# EAGLE board Qwiic_BMI270-Panel (EAGLE 9.6.2), part 1 of 3
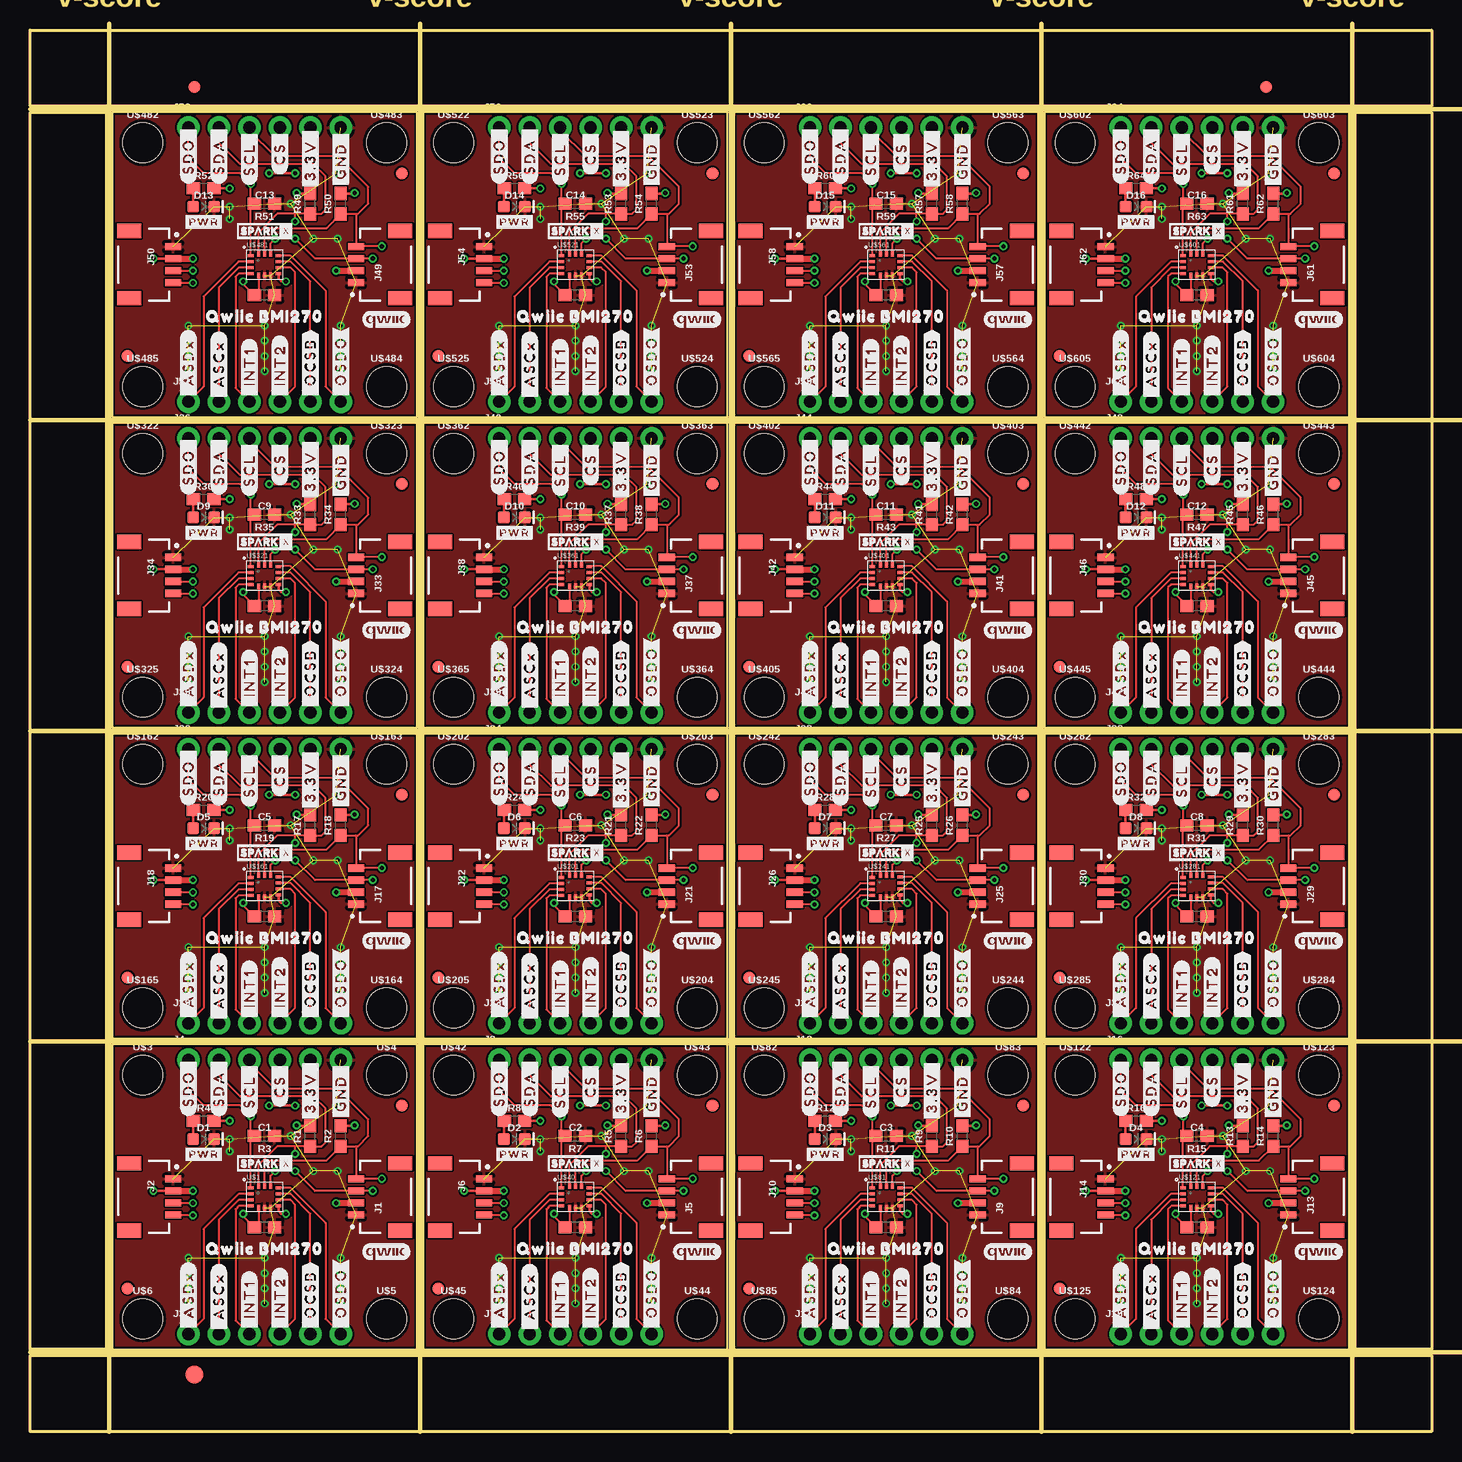
[diagram p0: board, top side]
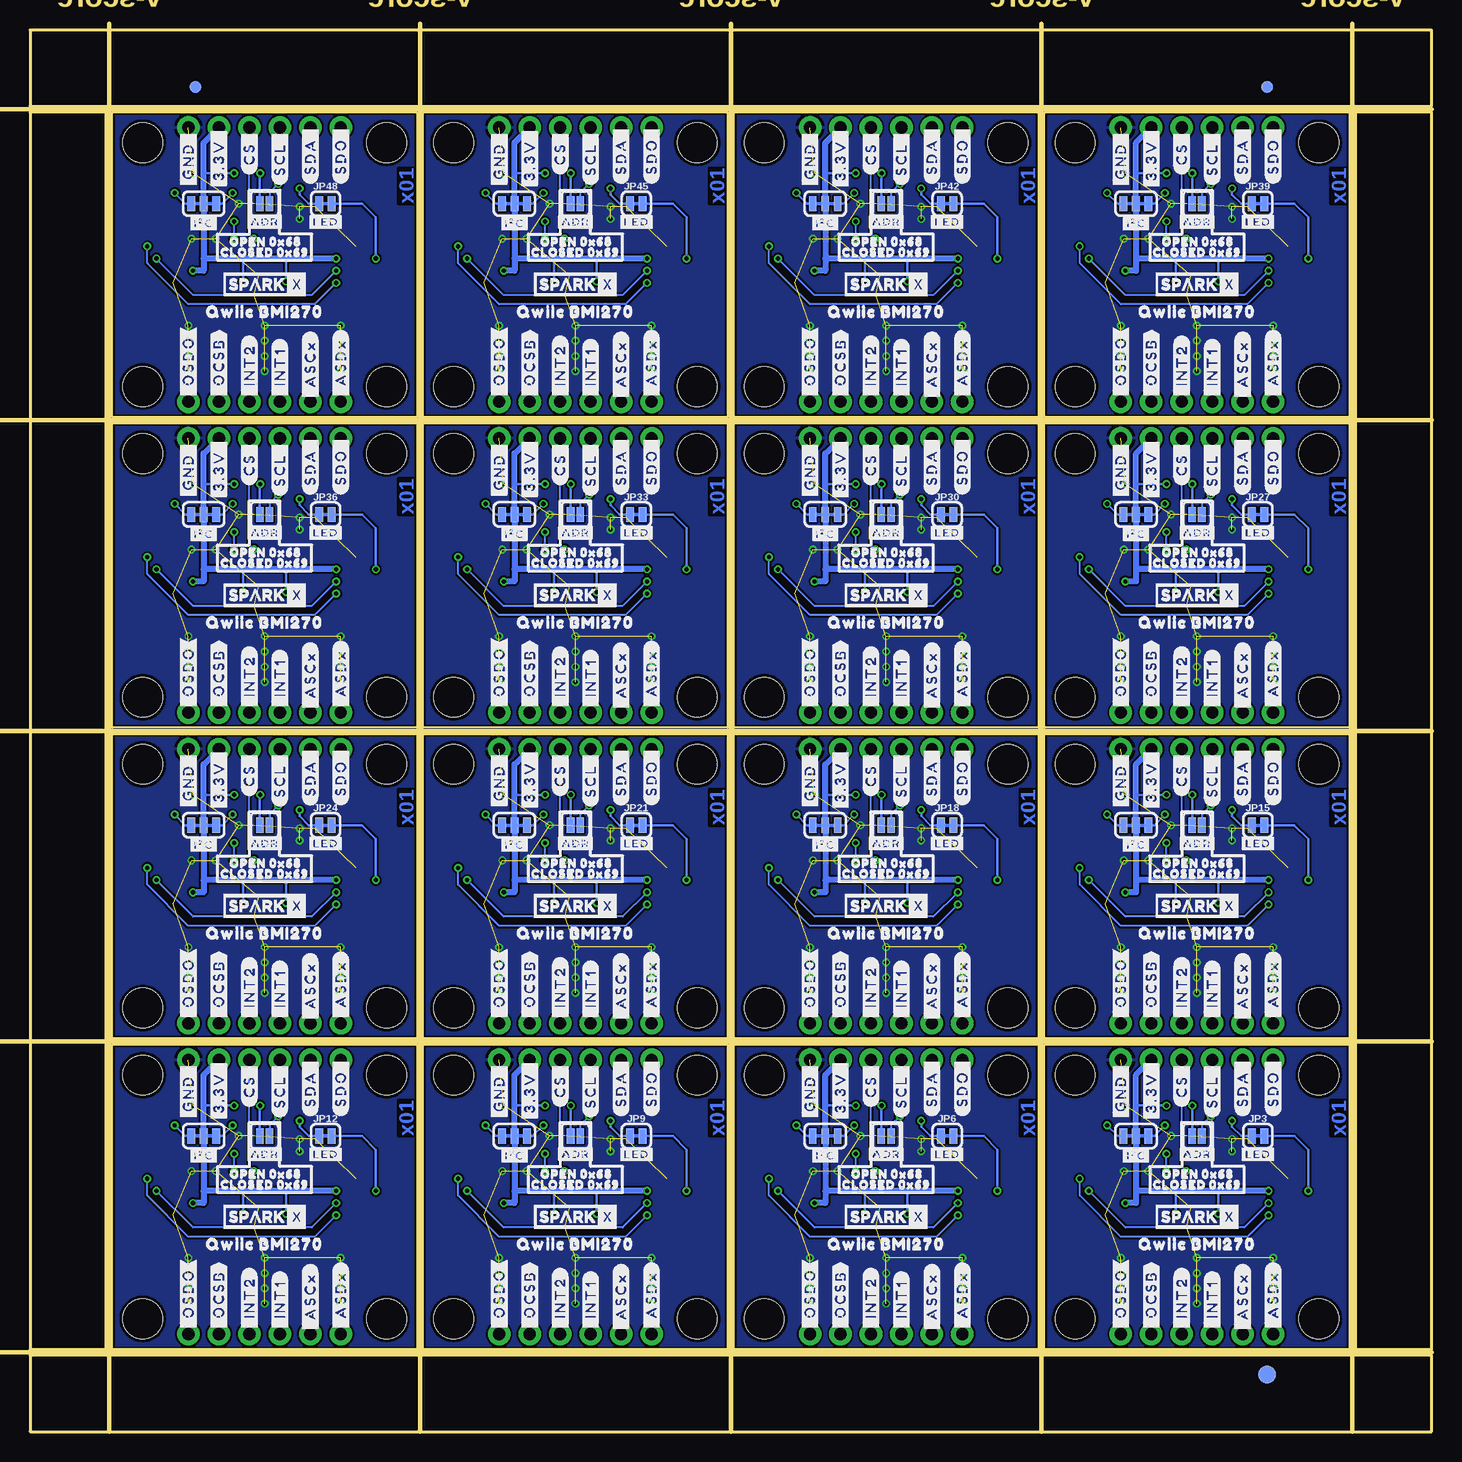
[diagram p1: board, bottom side, seen from below]

Size 116.84 x 116.84 mm. Coordinates in mm from the lower left corner, seen from the top.
Outline: 6.86,6.86 32.26,6.86 32.26,32.26 6.86,32.26 6.86,6.86
Outline: 32.77,6.86 58.17,6.86 58.17,32.26 32.77,32.26 32.77,6.86
Outline: 58.67,6.86 84.07,6.86 84.07,32.26 58.67,32.26 58.67,6.86
Outline: 84.58,6.86 109.98,6.86 109.98,32.26 84.58,32.26 84.58,6.86
Outline: 6.86,32.77 32.26,32.77 32.26,58.17 6.86,58.17 6.86,32.77
Outline: 32.77,32.77 58.17,32.77 58.17,58.17 32.77,58.17 32.77,32.77
Outline: 58.67,32.77 84.07,32.77 84.07,58.17 58.67,58.17 58.67,32.77
Outline: 84.58,32.77 109.98,32.77 109.98,58.17 84.58,58.17 84.58,32.77
Outline: 6.86,58.67 32.26,58.67 32.26,84.07 6.86,84.07 6.86,58.67
Outline: 32.77,58.67 58.17,58.67 58.17,84.07 32.77,84.07 32.77,58.67
Outline: 58.67,58.67 84.07,58.67 84.07,84.07 58.67,84.07 58.67,58.67
Outline: 84.58,58.67 109.98,58.67 109.98,84.07 84.58,84.07 84.58,58.67
Outline: 6.86,84.58 32.26,84.58 32.26,109.98 6.86,109.98 6.86,84.58
Outline: 32.77,84.58 58.17,84.58 58.17,109.98 32.77,109.98 32.77,84.58
Outline: 58.67,84.58 84.07,84.58 84.07,109.98 58.67,109.98 58.67,84.58
Outline: 84.58,84.58 109.98,84.58 109.98,109.98 84.58,109.98 84.58,84.58
Outline: 0,6.35 116.84,6.35 116.84,0 0,0 0,6.35
Outline: 110.49,109.98 116.84,109.98 116.84,6.86 110.49,6.86 110.49,109.98
Outline: 0,116.84 116.84,116.84 116.84,110.49 0,110.49 0,116.84
Outline: 0,109.98 6.35,109.98 6.35,6.86 0,6.86 0,109.98
Copper layers (1*16): Top 0.035mm / dielectric 1.5mm / Bottom 0.035mm
Design rules "Qwiic_BMI270": minimum track width 6mil, minimum drill 0.3mm, track to track 6mil, track to pad 6mil, pad to pad 6mil, via to via 6mil, smd to smd 6mil, copper to edge 6mil, drill to drill 6mil, minimum pad ring 6mil, minimum via ring 6mil, stop-mask expansion 4mil, vias tented up to drill 25mil, thermal gap 10mil
Milling: 10 lines

## Footprints (pad centres in the part's own frame; a part is rotated, then mirrored left to right if it is on the bottom)
0603 = smd 1.1 x 1: 1 -0.85,0; 2 0.85,0
LED-0603 = smd 1 x 1: A -0.877,0; C 0.877,0
FIDUCIAL-1X2 = smd 1 x 1: 1 0,0
FIDUCIAL-1.5X3 = smd 1.5 x 1.5: 1 0,0
JST04_1MM_RA = smd 0.6 x 1.35: 1 -1.5,0; 2 -0.5,0; 3 0.5,0; 4 1.5,0 | smd 1.2 x 2: NC1 2.8,-3.675; NC2 -2.8,-3.675
1X06_NO_SILK = drill 1.016 pad 1.88: 1 0,0; 2 2.54,0; 3 5.08,0; 4 7.62,0; 5 10.16,0; 6 12.7,0
SMT-JUMPER_3_2-NC_TRACE_SILK = smd 0.66 x 1.27: 1 -1.041,0; 2 0,0; 3 1.041,0
SMT-JUMPER_2_NO_SILK = smd 0.635 x 1.27: 1 -0.406,0; 2 0.406,0
SMT-JUMPER_2_NC_TRACE_SILK = smd 0.66 x 1.27: 1 -0.521,0; 2 0.521,0
BMI270 = smd 0.475 x 0.25: 1 -1.163,0.748; 2 -1.163,0.247; 3 -1.163,-0.253; 4 -1.163,-0.752; 8 1.163,-0.75; 9 1.163,-0.25; 10 1.163,0.25; 11 1.163,0.75 | smd 0.25 x 0.475: 5 -0.497,-0.912; 6 0.003,-0.912; 7 0.502,-0.912; 12 0.502,0.91; 13 0.003,0.91; 14 -0.497,0.91
STAND-OFF = hole 3.302: 0,0

## Placement (x,y rotation side)
C1  0.1uF  [0603]  19.56,17.02 180 top
C2  0.1uF  [0603]  45.47,17.02 180 top
C3  0.1uF  [0603]  71.37,17.02 180 top
C4  0.1uF  [0603]  97.28,17.02 180 top
C5  0.1uF  [0603]  19.56,42.93 180 top
C6  0.1uF  [0603]  45.47,42.93 180 top
C7  0.1uF  [0603]  71.37,42.93 180 top
C8  0.1uF  [0603]  97.28,42.93 180 top
C9  0.1uF  [0603]  19.56,68.83 180 top
C10  0.1uF  [0603]  45.47,68.83 180 top
C11  0.1uF  [0603]  71.37,68.83 180 top
C12  0.1uF  [0603]  97.28,68.83 180 top
C13  0.1uF  [0603]  19.56,94.74 180 top
C14  0.1uF  [0603]  45.47,94.74 180 top
C15  0.1uF  [0603]  71.37,94.74 180 top
C16  0.1uF  [0603]  97.28,94.74 180 top
D1  RED  [LED-0603]  14.48,24.38 0 top
D2  RED  [LED-0603]  40.39,24.38 0 top
D3  RED  [LED-0603]  66.29,24.38 0 top
D4  RED  [LED-0603]  92.2,24.38 0 top
D5  RED  [LED-0603]  14.48,50.29 0 top
D6  RED  [LED-0603]  40.39,50.29 0 top
D7  RED  [LED-0603]  66.29,50.29 0 top
D8  RED  [LED-0603]  92.2,50.29 0 top
D9  RED  [LED-0603]  14.48,76.2 0 top
D10  RED  [LED-0603]  40.39,76.2 0 top
D11  RED  [LED-0603]  66.29,76.2 0 top
D12  RED  [LED-0603]  92.2,76.2 0 top
D13  RED  [LED-0603]  14.48,102.11 0 top
D14  RED  [LED-0603]  40.39,102.11 0 top
D15  RED  [LED-0603]  66.29,102.11 0 top
D16  RED  [LED-0603]  92.2,102.11 0 top
E$1  [FIDUCIAL-1X2]  13.72,112.08 0 top
E$2  [FIDUCIAL-1X2]  13.72,112.08 0 bottom
E$3  [FIDUCIAL-1X2]  103.06,112.08 0 top
E$4  [FIDUCIAL-1X2]  103.06,112.08 0 bottom
E$5  [FIDUCIAL-1.5X3]  13.72,4.76 0 top
E$6  [FIDUCIAL-1.5X3]  13.72,4.76 0 bottom
FD1  FIDUCIAL1X2  [FIDUCIAL-1X2]  8.13,11.94 0 top
FD2  FIDUCIAL1X2  [FIDUCIAL-1X2]  30.99,27.18 0 top
FD3  FIDUCIAL1X2  [FIDUCIAL-1X2]  34.04,11.94 0 top
FD4  FIDUCIAL1X2  [FIDUCIAL-1X2]  56.9,27.18 0 top
FD5  FIDUCIAL1X2  [FIDUCIAL-1X2]  59.94,11.94 0 top
FD6  FIDUCIAL1X2  [FIDUCIAL-1X2]  82.8,27.18 0 top
FD7  FIDUCIAL1X2  [FIDUCIAL-1X2]  85.85,11.94 0 top
FD8  FIDUCIAL1X2  [FIDUCIAL-1X2]  108.71,27.18 0 top
FD9  FIDUCIAL1X2  [FIDUCIAL-1X2]  8.13,37.85 0 top
FD10  FIDUCIAL1X2  [FIDUCIAL-1X2]  30.99,53.09 0 top
FD11  FIDUCIAL1X2  [FIDUCIAL-1X2]  34.04,37.85 0 top
FD12  FIDUCIAL1X2  [FIDUCIAL-1X2]  56.9,53.09 0 top
FD13  FIDUCIAL1X2  [FIDUCIAL-1X2]  59.94,37.85 0 top
FD14  FIDUCIAL1X2  [FIDUCIAL-1X2]  82.8,53.09 0 top
FD15  FIDUCIAL1X2  [FIDUCIAL-1X2]  85.85,37.85 0 top
FD16  FIDUCIAL1X2  [FIDUCIAL-1X2]  108.71,53.09 0 top
FD17  FIDUCIAL1X2  [FIDUCIAL-1X2]  8.13,63.75 0 top
FD18  FIDUCIAL1X2  [FIDUCIAL-1X2]  30.99,78.99 0 top
FD19  FIDUCIAL1X2  [FIDUCIAL-1X2]  34.04,63.75 0 top
FD20  FIDUCIAL1X2  [FIDUCIAL-1X2]  56.9,78.99 0 top
FD21  FIDUCIAL1X2  [FIDUCIAL-1X2]  59.94,63.75 0 top
FD22  FIDUCIAL1X2  [FIDUCIAL-1X2]  82.8,78.99 0 top
FD23  FIDUCIAL1X2  [FIDUCIAL-1X2]  85.85,63.75 0 top
FD24  FIDUCIAL1X2  [FIDUCIAL-1X2]  108.71,78.99 0 top
FD25  FIDUCIAL1X2  [FIDUCIAL-1X2]  8.13,89.66 0 top
FD26  FIDUCIAL1X2  [FIDUCIAL-1X2]  30.99,104.9 0 top
FD27  FIDUCIAL1X2  [FIDUCIAL-1X2]  34.04,89.66 0 top
FD28  FIDUCIAL1X2  [FIDUCIAL-1X2]  56.9,104.9 0 top
FD29  FIDUCIAL1X2  [FIDUCIAL-1X2]  59.94,89.66 0 top
FD30  FIDUCIAL1X2  [FIDUCIAL-1X2]  82.8,104.9 0 top
FD31  FIDUCIAL1X2  [FIDUCIAL-1X2]  85.85,89.66 0 top
FD32  FIDUCIAL1X2  [FIDUCIAL-1X2]  108.71,104.9 0 top
FRAME1  FRAME-LETTERNO_PACKAGE  [DUMMY]  6.86,6.86 0 top
FRAME2  FRAME-LETTERNO_PACKAGE  [DUMMY]  32.77,6.86 0 top
FRAME3  FRAME-LETTERNO_PACKAGE  [DUMMY]  58.67,6.86 0 top
FRAME4  FRAME-LETTERNO_PACKAGE  [DUMMY]  84.58,6.86 0 top
FRAME5  FRAME-LETTERNO_PACKAGE  [DUMMY]  6.86,32.77 0 top
FRAME6  FRAME-LETTERNO_PACKAGE  [DUMMY]  32.77,32.77 0 top
FRAME7  FRAME-LETTERNO_PACKAGE  [DUMMY]  58.67,32.77 0 top
FRAME8  FRAME-LETTERNO_PACKAGE  [DUMMY]  84.58,32.77 0 top
FRAME9  FRAME-LETTERNO_PACKAGE  [DUMMY]  6.86,58.67 0 top
FRAME10  FRAME-LETTERNO_PACKAGE  [DUMMY]  32.77,58.67 0 top
FRAME11  FRAME-LETTERNO_PACKAGE  [DUMMY]  58.67,58.67 0 top
FRAME12  FRAME-LETTERNO_PACKAGE  [DUMMY]  84.58,58.67 0 top
FRAME13  FRAME-LETTERNO_PACKAGE  [DUMMY]  6.86,84.58 0 top
FRAME14  FRAME-LETTERNO_PACKAGE  [DUMMY]  32.77,84.58 0 top
FRAME15  FRAME-LETTERNO_PACKAGE  [DUMMY]  58.67,84.58 0 top
FRAME16  FRAME-LETTERNO_PACKAGE  [DUMMY]  84.58,84.58 0 top
J1  QWIIC_RIGHT_ANGLE  [JST04_1MM_RA]  27.18,19.56 90 top
J2  QWIIC_RIGHT_ANGLE  [JST04_1MM_RA]  11.94,19.56 270 top
J3  [1X06_NO_SILK]  13.21,8.13 0 top
J4  [1X06_NO_SILK]  13.21,30.99 0 top
J5  QWIIC_RIGHT_ANGLE  [JST04_1MM_RA]  53.09,19.56 90 top
J6  QWIIC_RIGHT_ANGLE  [JST04_1MM_RA]  37.85,19.56 270 top
J7  [1X06_NO_SILK]  39.12,8.13 0 top
J8  [1X06_NO_SILK]  39.12,30.99 0 top
J9  QWIIC_RIGHT_ANGLE  [JST04_1MM_RA]  78.99,19.56 90 top
J10  QWIIC_RIGHT_ANGLE  [JST04_1MM_RA]  63.75,19.56 270 top
J11  [1X06_NO_SILK]  65.02,8.13 0 top
J12  [1X06_NO_SILK]  65.02,30.99 0 top
J13  QWIIC_RIGHT_ANGLE  [JST04_1MM_RA]  104.9,19.56 90 top
J14  QWIIC_RIGHT_ANGLE  [JST04_1MM_RA]  89.66,19.56 270 top
J15  [1X06_NO_SILK]  90.93,8.13 0 top
J16  [1X06_NO_SILK]  90.93,30.99 0 top
J17  QWIIC_RIGHT_ANGLE  [JST04_1MM_RA]  27.18,45.47 90 top
J18  QWIIC_RIGHT_ANGLE  [JST04_1MM_RA]  11.94,45.47 270 top
J19  [1X06_NO_SILK]  13.21,34.04 0 top
J20  [1X06_NO_SILK]  13.21,56.9 0 top
J21  QWIIC_RIGHT_ANGLE  [JST04_1MM_RA]  53.09,45.47 90 top
J22  QWIIC_RIGHT_ANGLE  [JST04_1MM_RA]  37.85,45.47 270 top
J23  [1X06_NO_SILK]  39.12,34.04 0 top
J24  [1X06_NO_SILK]  39.12,56.9 0 top
J25  QWIIC_RIGHT_ANGLE  [JST04_1MM_RA]  78.99,45.47 90 top
J26  QWIIC_RIGHT_ANGLE  [JST04_1MM_RA]  63.75,45.47 270 top
J27  [1X06_NO_SILK]  65.02,34.04 0 top
J28  [1X06_NO_SILK]  65.02,56.9 0 top
J29  QWIIC_RIGHT_ANGLE  [JST04_1MM_RA]  104.9,45.47 90 top
J30  QWIIC_RIGHT_ANGLE  [JST04_1MM_RA]  89.66,45.47 270 top
J31  [1X06_NO_SILK]  90.93,34.04 0 top
J32  [1X06_NO_SILK]  90.93,56.9 0 top
J33  QWIIC_RIGHT_ANGLE  [JST04_1MM_RA]  27.18,71.37 90 top
J34  QWIIC_RIGHT_ANGLE  [JST04_1MM_RA]  11.94,71.37 270 top
J35  [1X06_NO_SILK]  13.21,59.94 0 top
J36  [1X06_NO_SILK]  13.21,82.8 0 top
J37  QWIIC_RIGHT_ANGLE  [JST04_1MM_RA]  53.09,71.37 90 top
J38  QWIIC_RIGHT_ANGLE  [JST04_1MM_RA]  37.85,71.37 270 top
J39  [1X06_NO_SILK]  39.12,59.94 0 top
J40  [1X06_NO_SILK]  39.12,82.8 0 top
J41  QWIIC_RIGHT_ANGLE  [JST04_1MM_RA]  78.99,71.37 90 top
J42  QWIIC_RIGHT_ANGLE  [JST04_1MM_RA]  63.75,71.37 270 top
J43  [1X06_NO_SILK]  65.02,59.94 0 top
J44  [1X06_NO_SILK]  65.02,82.8 0 top
J45  QWIIC_RIGHT_ANGLE  [JST04_1MM_RA]  104.9,71.37 90 top
J46  QWIIC_RIGHT_ANGLE  [JST04_1MM_RA]  89.66,71.37 270 top
J47  [1X06_NO_SILK]  90.93,59.94 0 top
J48  [1X06_NO_SILK]  90.93,82.8 0 top
J49  QWIIC_RIGHT_ANGLE  [JST04_1MM_RA]  27.18,97.28 90 top
J50  QWIIC_RIGHT_ANGLE  [JST04_1MM_RA]  11.94,97.28 270 top
J51  [1X06_NO_SILK]  13.21,85.85 0 top
J52  [1X06_NO_SILK]  13.21,108.71 0 top
J53  QWIIC_RIGHT_ANGLE  [JST04_1MM_RA]  53.09,97.28 90 top
J54  QWIIC_RIGHT_ANGLE  [JST04_1MM_RA]  37.85,97.28 270 top
J55  [1X06_NO_SILK]  39.12,85.85 0 top
J56  [1X06_NO_SILK]  39.12,108.71 0 top
J57  QWIIC_RIGHT_ANGLE  [JST04_1MM_RA]  78.99,97.28 90 top
J58  QWIIC_RIGHT_ANGLE  [JST04_1MM_RA]  63.75,97.28 270 top
J59  [1X06_NO_SILK]  65.02,85.85 0 top
J60  [1X06_NO_SILK]  65.02,108.71 0 top
J61  QWIIC_RIGHT_ANGLE  [JST04_1MM_RA]  104.9,97.28 90 top
J62  QWIIC_RIGHT_ANGLE  [JST04_1MM_RA]  89.66,97.28 270 top
J63  [1X06_NO_SILK]  90.93,85.85 0 top
J64  [1X06_NO_SILK]  90.93,108.71 0 top
JP1  JUMPER-SMT_3_2-NC_TRACE_SILK  [SMT-JUMPER_3_2-NC_TRACE_SILK]  24.64,24.64 180 bottom
JP2  JUMPER-SMT_2_NO_SILK  [SMT-JUMPER_2_NO_SILK]  19.56,24.64 180 bottom
JP3  JUMPER-SMT_2_NC_TRACE_SILK  [SMT-JUMPER_2_NC_TRACE_SILK]  14.48,24.64 0 bottom
JP4  JUMPER-SMT_3_2-NC_TRACE_SILK  [SMT-JUMPER_3_2-NC_TRACE_SILK]  50.55,24.64 180 bottom
JP5  JUMPER-SMT_2_NO_SILK  [SMT-JUMPER_2_NO_SILK]  45.47,24.64 180 bottom
JP6  JUMPER-SMT_2_NC_TRACE_SILK  [SMT-JUMPER_2_NC_TRACE_SILK]  40.39,24.64 0 bottom
JP7  JUMPER-SMT_3_2-NC_TRACE_SILK  [SMT-JUMPER_3_2-NC_TRACE_SILK]  76.45,24.64 180 bottom
JP8  JUMPER-SMT_2_NO_SILK  [SMT-JUMPER_2_NO_SILK]  71.37,24.64 180 bottom
JP9  JUMPER-SMT_2_NC_TRACE_SILK  [SMT-JUMPER_2_NC_TRACE_SILK]  66.29,24.64 0 bottom
JP10  JUMPER-SMT_3_2-NC_TRACE_SILK  [SMT-JUMPER_3_2-NC_TRACE_SILK]  102.36,24.64 180 bottom
JP11  JUMPER-SMT_2_NO_SILK  [SMT-JUMPER_2_NO_SILK]  97.28,24.64 180 bottom
JP12  JUMPER-SMT_2_NC_TRACE_SILK  [SMT-JUMPER_2_NC_TRACE_SILK]  92.2,24.64 0 bottom
JP13  JUMPER-SMT_3_2-NC_TRACE_SILK  [SMT-JUMPER_3_2-NC_TRACE_SILK]  24.64,50.55 180 bottom
JP14  JUMPER-SMT_2_NO_SILK  [SMT-JUMPER_2_NO_SILK]  19.56,50.55 180 bottom
JP15  JUMPER-SMT_2_NC_TRACE_SILK  [SMT-JUMPER_2_NC_TRACE_SILK]  14.48,50.55 0 bottom
JP16  JUMPER-SMT_3_2-NC_TRACE_SILK  [SMT-JUMPER_3_2-NC_TRACE_SILK]  50.55,50.55 180 bottom
JP17  JUMPER-SMT_2_NO_SILK  [SMT-JUMPER_2_NO_SILK]  45.47,50.55 180 bottom
JP18  JUMPER-SMT_2_NC_TRACE_SILK  [SMT-JUMPER_2_NC_TRACE_SILK]  40.39,50.55 0 bottom
JP19  JUMPER-SMT_3_2-NC_TRACE_SILK  [SMT-JUMPER_3_2-NC_TRACE_SILK]  76.45,50.55 180 bottom
JP20  JUMPER-SMT_2_NO_SILK  [SMT-JUMPER_2_NO_SILK]  71.37,50.55 180 bottom
JP21  JUMPER-SMT_2_NC_TRACE_SILK  [SMT-JUMPER_2_NC_TRACE_SILK]  66.29,50.55 0 bottom
JP22  JUMPER-SMT_3_2-NC_TRACE_SILK  [SMT-JUMPER_3_2-NC_TRACE_SILK]  102.36,50.55 180 bottom
JP23  JUMPER-SMT_2_NO_SILK  [SMT-JUMPER_2_NO_SILK]  97.28,50.55 180 bottom
JP24  JUMPER-SMT_2_NC_TRACE_SILK  [SMT-JUMPER_2_NC_TRACE_SILK]  92.2,50.55 0 bottom
JP25  JUMPER-SMT_3_2-NC_TRACE_SILK  [SMT-JUMPER_3_2-NC_TRACE_SILK]  24.64,76.45 180 bottom
JP26  JUMPER-SMT_2_NO_SILK  [SMT-JUMPER_2_NO_SILK]  19.56,76.45 180 bottom
JP27  JUMPER-SMT_2_NC_TRACE_SILK  [SMT-JUMPER_2_NC_TRACE_SILK]  14.48,76.45 0 bottom
JP28  JUMPER-SMT_3_2-NC_TRACE_SILK  [SMT-JUMPER_3_2-NC_TRACE_SILK]  50.55,76.45 180 bottom
JP29  JUMPER-SMT_2_NO_SILK  [SMT-JUMPER_2_NO_SILK]  45.47,76.45 180 bottom
JP30  JUMPER-SMT_2_NC_TRACE_SILK  [SMT-JUMPER_2_NC_TRACE_SILK]  40.39,76.45 0 bottom
JP31  JUMPER-SMT_3_2-NC_TRACE_SILK  [SMT-JUMPER_3_2-NC_TRACE_SILK]  76.45,76.45 180 bottom
JP32  JUMPER-SMT_2_NO_SILK  [SMT-JUMPER_2_NO_SILK]  71.37,76.45 180 bottom
JP33  JUMPER-SMT_2_NC_TRACE_SILK  [SMT-JUMPER_2_NC_TRACE_SILK]  66.29,76.45 0 bottom
JP34  JUMPER-SMT_3_2-NC_TRACE_SILK  [SMT-JUMPER_3_2-NC_TRACE_SILK]  102.36,76.45 180 bottom
JP35  JUMPER-SMT_2_NO_SILK  [SMT-JUMPER_2_NO_SILK]  97.28,76.45 180 bottom
JP36  JUMPER-SMT_2_NC_TRACE_SILK  [SMT-JUMPER_2_NC_TRACE_SILK]  92.2,76.45 0 bottom
JP37  JUMPER-SMT_3_2-NC_TRACE_SILK  [SMT-JUMPER_3_2-NC_TRACE_SILK]  24.64,102.36 180 bottom
JP38  JUMPER-SMT_2_NO_SILK  [SMT-JUMPER_2_NO_SILK]  19.56,102.36 180 bottom
JP39  JUMPER-SMT_2_NC_TRACE_SILK  [SMT-JUMPER_2_NC_TRACE_SILK]  14.48,102.36 0 bottom
JP40  JUMPER-SMT_3_2-NC_TRACE_SILK  [SMT-JUMPER_3_2-NC_TRACE_SILK]  50.55,102.36 180 bottom
JP41  JUMPER-SMT_2_NO_SILK  [SMT-JUMPER_2_NO_SILK]  45.47,102.36 180 bottom
JP42  JUMPER-SMT_2_NC_TRACE_SILK  [SMT-JUMPER_2_NC_TRACE_SILK]  40.39,102.36 0 bottom
JP43  JUMPER-SMT_3_2-NC_TRACE_SILK  [SMT-JUMPER_3_2-NC_TRACE_SILK]  76.45,102.36 180 bottom
JP44  JUMPER-SMT_2_NO_SILK  [SMT-JUMPER_2_NO_SILK]  71.37,102.36 180 bottom
JP45  JUMPER-SMT_2_NC_TRACE_SILK  [SMT-JUMPER_2_NC_TRACE_SILK]  66.29,102.36 0 bottom
JP46  JUMPER-SMT_3_2-NC_TRACE_SILK  [SMT-JUMPER_3_2-NC_TRACE_SILK]  102.36,102.36 180 bottom
JP47  JUMPER-SMT_2_NO_SILK  [SMT-JUMPER_2_NO_SILK]  97.28,102.36 180 bottom
JP48  JUMPER-SMT_2_NC_TRACE_SILK  [SMT-JUMPER_2_NC_TRACE_SILK]  92.2,102.36 0 bottom
R1  2.2k  [0603]  23.37,24.64 90 top
R2  2.2k  [0603]  25.91,24.64 90 top
R3  10k  [0603]  19.56,24.64 180 top
R4  1k  [0603]  14.48,25.91 0 top
R5  2.2k  [0603]  49.28,24.64 90 top
R6  2.2k  [0603]  51.82,24.64 90 top
R7  10k  [0603]  45.47,24.64 180 top
R8  1k  [0603]  40.39,25.91 0 top
R9  2.2k  [0603]  75.18,24.64 90 top
R10  2.2k  [0603]  77.72,24.64 90 top
R11  10k  [0603]  71.37,24.64 180 top
R12  1k  [0603]  66.29,25.91 0 top
R13  2.2k  [0603]  101.09,24.64 90 top
R14  2.2k  [0603]  103.63,24.64 90 top
R15  10k  [0603]  97.28,24.64 180 top
R16  1k  [0603]  92.2,25.91 0 top
R17  2.2k  [0603]  23.37,50.55 90 top
R18  2.2k  [0603]  25.91,50.55 90 top
R19  10k  [0603]  19.56,50.55 180 top
R20  1k  [0603]  14.48,51.82 0 top
R21  2.2k  [0603]  49.28,50.55 90 top
R22  2.2k  [0603]  51.82,50.55 90 top
R23  10k  [0603]  45.47,50.55 180 top
R24  1k  [0603]  40.39,51.82 0 top
R25  2.2k  [0603]  75.18,50.55 90 top
R26  2.2k  [0603]  77.72,50.55 90 top
R27  10k  [0603]  71.37,50.55 180 top
R28  1k  [0603]  66.29,51.82 0 top
R29  2.2k  [0603]  101.09,50.55 90 top
R30  2.2k  [0603]  103.63,50.55 90 top
R31  10k  [0603]  97.28,50.55 180 top
R32  1k  [0603]  92.2,51.82 0 top
R33  2.2k  [0603]  23.37,76.45 90 top
R34  2.2k  [0603]  25.91,76.45 90 top
R35  10k  [0603]  19.56,76.45 180 top
R36  1k  [0603]  14.48,77.72 0 top
R37  2.2k  [0603]  49.28,76.45 90 top
R38  2.2k  [0603]  51.82,76.45 90 top
R39  10k  [0603]  45.47,76.45 180 top
R40  1k  [0603]  40.39,77.72 0 top
R41  2.2k  [0603]  75.18,76.45 90 top
R42  2.2k  [0603]  77.72,76.45 90 top
R43  10k  [0603]  71.37,76.45 180 top
R44  1k  [0603]  66.29,77.72 0 top
R45  2.2k  [0603]  101.09,76.45 90 top
R46  2.2k  [0603]  103.63,76.45 90 top
R47  10k  [0603]  97.28,76.45 180 top
R48  1k  [0603]  92.2,77.72 0 top
R49  2.2k  [0603]  23.37,102.36 90 top
R50  2.2k  [0603]  25.91,102.36 90 top
R51  10k  [0603]  19.56,102.36 180 top
R52  1k  [0603]  14.48,103.63 0 top
R53  2.2k  [0603]  49.28,102.36 90 top
R54  2.2k  [0603]  51.82,102.36 90 top
R55  10k  [0603]  45.47,102.36 180 top
R56  1k  [0603]  40.39,103.63 0 top
R57  2.2k  [0603]  75.18,102.36 90 top
R58  2.2k  [0603]  77.72,102.36 90 top
R59  10k  [0603]  71.37,102.36 180 top
R60  1k  [0603]  66.29,103.63 0 top
R61  2.2k  [0603]  101.09,102.36 90 top
R62  2.2k  [0603]  103.63,102.36 90 top
R63  10k  [0603]  97.28,102.36 180 top
R64  1k  [0603]  92.2,103.63 0 top
U$1  BMI270  [BMI270]  19.56,19.56 0 top
U$2  [#3#3V_#4]  23.37,30.99 90 top
U$3  [STAND-OFF]  9.4,29.72 0 top
U$4  [STAND-OFF]  29.72,29.72 0 top
U$5  [STAND-OFF]  29.72,9.4 0 top
U$6  [STAND-OFF]  9.4,9.4 0 top
U$7  [#GND_#4]  25.91,30.73 90 top
U$8  [#CS_#3]  20.83,30.73 90 top
U$9  [#SCL_#2]  18.29,30.73 90 top
U$10  [#SDA_#1]  15.75,31.12 90 top
U$11  [#SDO_#0]  13.21,31.12 90 top
U$12  [#_OSDO#8]  25.91,8.38 90 top
U$13  [#_OCSB#7]  23.37,8.38 90 top
U$14  [#_INT1#7]  18.29,8.38 90 top
U$15  [#_INT2#7]  20.83,8.38 90 top
U$16  [#_ASCX#5]  15.75,8.25 90 top
U$17  [#_ASDX#6]  13.21,8.38 90 top
U$18  [#PWR#2711]  14.48,23.11 0 top
U$19  [QWIIC_BMI2709]  19.56,15.24 0 top
U$20  [SPARKX-TINY]  19.56,22.35 0 top
U$21  [#I�C#2714]  24.64,22.99 0 bottom
U$22  [#LED#2712]  14.48,23.11 0 bottom
U$23  [#ADR#2713]  19.56,23.11 0 bottom
U$24  [OPEN_0X682714]  22.99,21.46 0 bottom
U$25  [CLOSED_0X692714]  23.75,20.57 0 bottom
U$26  [QWIIC_BMI2709]  19.56,15.62 0 bottom
U$27  [SPARKX-SMALL]  19.56,17.91 0 bottom
U$28  [#_OSDO#8]  25.91,8.38 90 bottom
U$29  [#_OCSB#7]  23.37,8.38 90 bottom
U$30  [#_INT2#7]  20.83,8.38 90 bottom
U$31  [#_INT1#7]  18.29,8.38 90 bottom
U$32  [#_ASCX#5]  15.75,8.25 90 bottom
U$33  [#_ASDX#6]  13.21,8.38 90 bottom
U$34  [#GND_#4]  25.91,30.73 90 bottom
U$35  [#3#3V_#4]  23.37,30.99 90 bottom
U$36  [#CS_#3]  20.83,30.73 90 bottom
U$37  [#SCL_#2]  18.29,30.73 90 bottom
U$38  [#SDA_#1]  15.75,31.12 90 bottom
U$39  [#SDO_#0]  13.21,31.12 90 bottom
U$40  BMI270  [BMI270]  45.47,19.56 0 top
U$41  [QWIIC_4MM]  29.72,14.99 0 top
U$42  [STAND-OFF]  35.31,29.72 0 top
U$43  [STAND-OFF]  55.63,29.72 0 top
U$44  [STAND-OFF]  55.63,9.4 0 top
U$45  [STAND-OFF]  35.31,9.4 0 top
U$46  [#3#3V_#4]  49.28,30.99 90 top
U$47  [#GND_#4]  51.82,30.73 90 top
U$48  [#CS_#3]  46.74,30.73 90 top
U$49  [#SCL_#2]  44.2,30.73 90 top
U$50  [#SDA_#1]  41.66,31.12 90 top
U$51  [#SDO_#0]  39.12,31.12 90 top
U$52  [#_OSDO#8]  51.82,8.38 90 top
U$53  [#_OCSB#7]  49.28,8.38 90 top
U$54  [#_INT1#7]  44.2,8.38 90 top
U$55  [#_INT2#7]  46.74,8.38 90 top
U$56  [#_ASCX#5]  41.66,8.25 90 top
U$57  [#_ASDX#6]  39.12,8.38 90 top
U$58  [#PWR#2711]  40.39,23.11 0 top
U$59  [QWIIC_BMI2709]  45.47,15.24 0 top
U$60  [SPARKX-TINY]  45.47,22.35 0 top
U$61  [#I�C#2714]  50.55,22.99 0 bottom
U$62  [#LED#2712]  40.39,23.11 0 bottom
U$63  [#ADR#2713]  45.47,23.11 0 bottom
U$64  [OPEN_0X682714]  48.89,21.46 0 bottom
U$65  [CLOSED_0X692714]  49.66,20.57 0 bottom
U$66  [QWIIC_BMI2709]  45.47,15.62 0 bottom
U$67  [SPARKX-SMALL]  45.47,17.91 0 bottom
U$68  [#_OSDO#8]  51.82,8.38 90 bottom
U$69  [#_OCSB#7]  49.28,8.38 90 bottom
U$70  [#_INT2#7]  46.74,8.38 90 bottom
U$71  [#_INT1#7]  44.2,8.38 90 bottom
U$72  [#_ASCX#5]  41.66,8.25 90 bottom
U$73  [#_ASDX#6]  39.12,8.38 90 bottom
U$74  [#GND_#4]  51.82,30.73 90 bottom
U$75  [#3#3V_#4]  49.28,30.99 90 bottom
U$76  [#CS_#3]  46.74,30.73 90 bottom
U$77  [#SCL_#2]  44.2,30.73 90 bottom
U$78  [#SDA_#1]  41.66,31.12 90 bottom
U$79  [#SDO_#0]  39.12,31.12 90 bottom
U$80  [QWIIC_4MM]  55.63,14.99 0 top
U$81  BMI270  [BMI270]  71.37,19.56 0 top
U$82  [STAND-OFF]  61.21,29.72 0 top
U$83  [STAND-OFF]  81.53,29.72 0 top
U$84  [STAND-OFF]  81.53,9.4 0 top
U$85  [STAND-OFF]  61.21,9.4 0 top
U$86  [#3#3V_#4]  75.18,30.99 90 top
U$87  [#GND_#4]  77.72,30.73 90 top
U$88  [#CS_#3]  72.64,30.73 90 top
U$89  [#SCL_#2]  70.1,30.73 90 top
U$90  [#SDA_#1]  67.56,31.12 90 top
U$91  [#SDO_#0]  65.02,31.12 90 top
U$92  [#_OSDO#8]  77.72,8.38 90 top
U$93  [#_OCSB#7]  75.18,8.38 90 top
U$94  [#_INT1#7]  70.1,8.38 90 top
U$95  [#_INT2#7]  72.64,8.38 90 top
U$96  [#_ASCX#5]  67.56,8.25 90 top
U$97  [#_ASDX#6]  65.02,8.38 90 top
U$98  [#PWR#2711]  66.29,23.11 0 top
U$99  [QWIIC_BMI2709]  71.37,15.24 0 top
U$100  [SPARKX-TINY]  71.37,22.35 0 top
U$101  [#I�C#2714]  76.45,22.99 0 bottom
U$102  [#LED#2712]  66.29,23.11 0 bottom
U$103  [#ADR#2713]  71.37,23.11 0 bottom
U$104  [OPEN_0X682714]  74.8,21.46 0 bottom
U$105  [CLOSED_0X692714]  75.56,20.57 0 bottom
U$106  [QWIIC_BMI2709]  71.37,15.62 0 bottom
U$107  [SPARKX-SMALL]  71.37,17.91 0 bottom
U$108  [#_OSDO#8]  77.72,8.38 90 bottom
U$109  [#_OCSB#7]  75.18,8.38 90 bottom
U$110  [#_INT2#7]  72.64,8.38 90 bottom
U$111  [#_INT1#7]  70.1,8.38 90 bottom
U$112  [#_ASCX#5]  67.56,8.25 90 bottom
U$113  [#_ASDX#6]  65.02,8.38 90 bottom
U$114  [#GND_#4]  77.72,30.73 90 bottom
U$115  [#3#3V_#4]  75.18,30.99 90 bottom
U$116  [#CS_#3]  72.64,30.73 90 bottom
U$117  [#SCL_#2]  70.1,30.73 90 bottom
U$118  [#SDA_#1]  67.56,31.12 90 bottom
U$119  [#SDO_#0]  65.02,31.12 90 bottom
U$120  [QWIIC_4MM]  81.53,14.99 0 top
U$121  BMI270  [BMI270]  97.28,19.56 0 top
U$122  [STAND-OFF]  87.12,29.72 0 top
U$123  [STAND-OFF]  107.44,29.72 0 top
U$124  [STAND-OFF]  107.44,9.4 0 top
U$125  [STAND-OFF]  87.12,9.4 0 top
U$126  [#3#3V_#4]  101.09,30.99 90 top
U$127  [#GND_#4]  103.63,30.73 90 top
U$128  [#CS_#3]  98.55,30.73 90 top
U$129  [#SCL_#2]  96.01,30.73 90 top
U$130  [#SDA_#1]  93.47,31.12 90 top
U$131  [#SDO_#0]  90.93,31.12 90 top
U$132  [#_OSDO#8]  103.63,8.38 90 top
U$133  [#_OCSB#7]  101.09,8.38 90 top
U$134  [#_INT1#7]  96.01,8.38 90 top
U$135  [#_INT2#7]  98.55,8.38 90 top
U$136  [#_ASCX#5]  93.47,8.25 90 top
U$137  [#_ASDX#6]  90.93,8.38 90 top
U$138  [#PWR#2711]  92.2,23.11 0 top
U$139  [QWIIC_BMI2709]  97.28,15.24 0 top
U$140  [SPARKX-TINY]  97.28,22.35 0 top
U$141  [#I�C#2714]  102.36,22.99 0 bottom
U$142  [#LED#2712]  92.2,23.11 0 bottom
U$143  [#ADR#2713]  97.28,23.11 0 bottom
U$144  [OPEN_0X682714]  100.71,21.46 0 bottom
U$145  [CLOSED_0X692714]  101.47,20.57 0 bottom
U$146  [QWIIC_BMI2709]  97.28,15.62 0 bottom
U$147  [SPARKX-SMALL]  97.28,17.91 0 bottom
U$148  [#_OSDO#8]  103.63,8.38 90 bottom
U$149  [#_OCSB#7]  101.09,8.38 90 bottom
U$150  [#_INT2#7]  98.55,8.38 90 bottom
U$151  [#_INT1#7]  96.01,8.38 90 bottom
U$152  [#_ASCX#5]  93.47,8.25 90 bottom
U$153  [#_ASDX#6]  90.93,8.38 90 bottom
U$154  [#GND_#4]  103.63,30.73 90 bottom
U$155  [#3#3V_#4]  101.09,30.99 90 bottom
U$156  [#CS_#3]  98.55,30.73 90 bottom
U$157  [#SCL_#2]  96.01,30.73 90 bottom
U$158  [#SDA_#1]  93.47,31.12 90 bottom
U$159  [#SDO_#0]  90.93,31.12 90 bottom
U$160  [QWIIC_4MM]  107.44,14.99 0 top
U$161  BMI270  [BMI270]  19.56,45.47 0 top
U$162  [STAND-OFF]  9.4,55.63 0 top
U$163  [STAND-OFF]  29.72,55.63 0 top
U$164  [STAND-OFF]  29.72,35.31 0 top
U$165  [STAND-OFF]  9.4,35.31 0 top
U$166  [#3#3V_#4]  23.37,56.9 90 top
U$167  [#GND_#4]  25.91,56.64 90 top
U$168  [#CS_#3]  20.83,56.64 90 top
U$169  [#SCL_#2]  18.29,56.64 90 top
U$170  [#SDA_#1]  15.75,57.02 90 top
U$171  [#SDO_#0]  13.21,57.02 90 top
U$172  [#_OSDO#8]  25.91,34.29 90 top
U$173  [#_OCSB#7]  23.37,34.29 90 top
U$174  [#_INT1#7]  18.29,34.29 90 top
U$175  [#_INT2#7]  20.83,34.29 90 top
U$176  [#_ASCX#5]  15.75,34.16 90 top
U$177  [#_ASDX#6]  13.21,34.29 90 top
U$178  [#PWR#2711]  14.48,49.02 0 top
U$179  [QWIIC_BMI2709]  19.56,41.15 0 top
U$180  [SPARKX-TINY]  19.56,48.26 0 top
U$181  [#I�C#2714]  24.64,48.89 0 bottom
U$182  [#LED#2712]  14.48,49.02 0 bottom
U$183  [#ADR#2713]  19.56,49.02 0 bottom
U$184  [OPEN_0X682714]  22.99,47.37 0 bottom
U$185  [CLOSED_0X692714]  23.75,46.48 0 bottom
U$186  [QWIIC_BMI2709]  19.56,41.53 0 bottom
U$187  [SPARKX-SMALL]  19.56,43.81 0 bottom
U$188  [#_OSDO#8]  25.91,34.29 90 bottom
U$189  [#_OCSB#7]  23.37,34.29 90 bottom
U$190  [#_INT2#7]  20.83,34.29 90 bottom
U$191  [#_INT1#7]  18.29,34.29 90 bottom
U$192  [#_ASCX#5]  15.75,34.16 90 bottom
U$193  [#_ASDX#6]  13.21,34.29 90 bottom
U$194  [#GND_#4]  25.91,56.64 90 bottom
U$195  [#3#3V_#4]  23.37,56.9 90 bottom
U$196  [#CS_#3]  20.83,56.64 90 bottom
U$197  [#SCL_#2]  18.29,56.64 90 bottom
U$198  [#SDA_#1]  15.75,57.02 90 bottom
U$199  [#SDO_#0]  13.21,57.02 90 bottom
U$200  [QWIIC_4MM]  29.72,40.89 0 top
U$201  BMI270  [BMI270]  45.47,45.47 0 top
U$202  [STAND-OFF]  35.31,55.63 0 top
U$203  [STAND-OFF]  55.63,55.63 0 top
U$204  [STAND-OFF]  55.63,35.31 0 top
U$205  [STAND-OFF]  35.31,35.31 0 top
U$206  [#3#3V_#4]  49.28,56.9 90 top
U$207  [#GND_#4]  51.82,56.64 90 top
U$208  [#CS_#3]  46.74,56.64 90 top
U$209  [#SCL_#2]  44.2,56.64 90 top
U$210  [#SDA_#1]  41.66,57.02 90 top
U$211  [#SDO_#0]  39.12,57.02 90 top
U$212  [#_OSDO#8]  51.82,34.29 90 top
U$213  [#_OCSB#7]  49.28,34.29 90 top
U$214  [#_INT1#7]  44.2,34.29 90 top
U$215  [#_INT2#7]  46.74,34.29 90 top
U$216  [#_ASCX#5]  41.66,34.16 90 top
U$217  [#_ASDX#6]  39.12,34.29 90 top
U$218  [#PWR#2711]  40.39,49.02 0 top
U$219  [QWIIC_BMI2709]  45.47,41.15 0 top
U$220  [SPARKX-TINY]  45.47,48.26 0 top
U$221  [#I�C#2714]  50.55,48.89 0 bottom
U$222  [#LED#2712]  40.39,49.02 0 bottom
U$223  [#ADR#2713]  45.47,49.02 0 bottom
U$224  [OPEN_0X682714]  48.89,47.37 0 bottom
U$225  [CLOSED_0X692714]  49.66,46.48 0 bottom
U$226  [QWIIC_BMI2709]  45.47,41.53 0 bottom
U$227  [SPARKX-SMALL]  45.47,43.81 0 bottom
U$228  [#_OSDO#8]  51.82,34.29 90 bottom
U$229  [#_OCSB#7]  49.28,34.29 90 bottom
U$230  [#_INT2#7]  46.74,34.29 90 bottom
U$231  [#_INT1#7]  44.2,34.29 90 bottom
U$232  [#_ASCX#5]  41.66,34.16 90 bottom
U$233  [#_ASDX#6]  39.12,34.29 90 bottom
U$234  [#GND_#4]  51.82,56.64 90 bottom
U$235  [#3#3V_#4]  49.28,56.9 90 bottom
U$236  [#CS_#3]  46.74,56.64 90 bottom
U$237  [#SCL_#2]  44.2,56.64 90 bottom
U$238  [#SDA_#1]  41.66,57.02 90 bottom
U$239  [#SDO_#0]  39.12,57.02 90 bottom
U$240  [QWIIC_4MM]  55.63,40.89 0 top
U$241  BMI270  [BMI270]  71.37,45.47 0 top
U$242  [STAND-OFF]  61.21,55.63 0 top
U$243  [STAND-OFF]  81.53,55.63 0 top
U$244  [STAND-OFF]  81.53,35.31 0 top
U$245  [STAND-OFF]  61.21,35.31 0 top
U$246  [#3#3V_#4]  75.18,56.9 90 top
U$247  [#GND_#4]  77.72,56.64 90 top
U$248  [#CS_#3]  72.64,56.64 90 top
U$249  [#SCL_#2]  70.1,56.64 90 top
U$250  [#SDA_#1]  67.56,57.02 90 top
U$251  [#SDO_#0]  65.02,57.02 90 top
U$252  [#_OSDO#8]  77.72,34.29 90 top
U$253  [#_OCSB#7]  75.18,34.29 90 top
U$254  [#_INT1#7]  70.1,34.29 90 top
U$255  [#_INT2#7]  72.64,34.29 90 top
U$256  [#_ASCX#5]  67.56,34.16 90 top
U$257  [#_ASDX#6]  65.02,34.29 90 top
U$258  [#PWR#2711]  66.29,49.02 0 top
U$259  [QWIIC_BMI2709]  71.37,41.15 0 top
U$260  [SPARKX-TINY]  71.37,48.26 0 top
U$261  [#I�C#2714]  76.45,48.89 0 bottom
U$262  [#LED#2712]  66.29,49.02 0 bottom
U$263  [#ADR#2713]  71.37,49.02 0 bottom
U$264  [OPEN_0X682714]  74.8,47.37 0 bottom
U$265  [CLOSED_0X692714]  75.56,46.48 0 bottom
U$266  [QWIIC_BMI2709]  71.37,41.53 0 bottom
U$267  [SPARKX-SMALL]  71.37,43.81 0 bottom
U$268  [#_OSDO#8]  77.72,34.29 90 bottom
U$269  [#_OCSB#7]  75.18,34.29 90 bottom
U$270  [#_INT2#7]  72.64,34.29 90 bottom
U$271  [#_INT1#7]  70.1,34.29 90 bottom
U$272  [#_ASCX#5]  67.56,34.16 90 bottom
U$273  [#_ASDX#6]  65.02,34.29 90 bottom
U$274  [#GND_#4]  77.72,56.64 90 bottom
U$275  [#3#3V_#4]  75.18,56.9 90 bottom
U$276  [#CS_#3]  72.64,56.64 90 bottom
U$277  [#SCL_#2]  70.1,56.64 90 bottom
U$278  [#SDA_#1]  67.56,57.02 90 bottom
U$279  [#SDO_#0]  65.02,57.02 90 bottom
U$280  [QWIIC_4MM]  81.53,40.89 0 top
U$281  BMI270  [BMI270]  97.28,45.47 0 top
U$282  [STAND-OFF]  87.12,55.63 0 top
U$283  [STAND-OFF]  107.44,55.63 0 top
U$284  [STAND-OFF]  107.44,35.31 0 top
U$285  [STAND-OFF]  87.12,35.31 0 top
U$286  [#3#3V_#4]  101.09,56.9 90 top
U$287  [#GND_#4]  103.63,56.64 90 top
U$288  [#CS_#3]  98.55,56.64 90 top
U$289  [#SCL_#2]  96.01,56.64 90 top
U$290  [#SDA_#1]  93.47,57.02 90 top
U$291  [#SDO_#0]  90.93,57.02 90 top
U$292  [#_OSDO#8]  103.63,34.29 90 top
U$293  [#_OCSB#7]  101.09,34.29 90 top
U$294  [#_INT1#7]  96.01,34.29 90 top
U$295  [#_INT2#7]  98.55,34.29 90 top
U$296  [#_ASCX#5]  93.47,34.16 90 top
U$297  [#_ASDX#6]  90.93,34.29 90 top
U$298  [#PWR#2711]  92.2,49.02 0 top
U$299  [QWIIC_BMI2709]  97.28,41.15 0 top
U$300  [SPARKX-TINY]  97.28,48.26 0 top
U$301  [#I�C#2714]  102.36,48.89 0 bottom
U$302  [#LED#2712]  92.2,49.02 0 bottom
U$303  [#ADR#2713]  97.28,49.02 0 bottom
U$304  [OPEN_0X682714]  100.71,47.37 0 bottom
U$305  [CLOSED_0X692714]  101.47,46.48 0 bottom
U$306  [QWIIC_BMI2709]  97.28,41.53 0 bottom
U$307  [SPARKX-SMALL]  97.28,43.81 0 bottom
U$308  [#_OSDO#8]  103.63,34.29 90 bottom
U$309  [#_OCSB#7]  101.09,34.29 90 bottom
U$310  [#_INT2#7]  98.55,34.29 90 bottom
U$311  [#_INT1#7]  96.01,34.29 90 bottom
U$312  [#_ASCX#5]  93.47,34.16 90 bottom
U$313  [#_ASDX#6]  90.93,34.29 90 bottom
U$314  [#GND_#4]  103.63,56.64 90 bottom
U$315  [#3#3V_#4]  101.09,56.9 90 bottom
U$316  [#CS_#3]  98.55,56.64 90 bottom
U$317  [#SCL_#2]  96.01,56.64 90 bottom
U$318  [#SDA_#1]  93.47,57.02 90 bottom
U$319  [#SDO_#0]  90.93,57.02 90 bottom
U$320  [QWIIC_4MM]  107.44,40.89 0 top
U$321  BMI270  [BMI270]  19.56,71.37 0 top
U$322  [STAND-OFF]  9.4,81.53 0 top
U$323  [STAND-OFF]  29.72,81.53 0 top
U$324  [STAND-OFF]  29.72,61.21 0 top
U$325  [STAND-OFF]  9.4,61.21 0 top
U$326  [#3#3V_#4]  23.37,82.8 90 top
U$327  [#GND_#4]  25.91,82.55 90 top
U$328  [#CS_#3]  20.83,82.55 90 top
U$329  [#SCL_#2]  18.29,82.55 90 top
U$330  [#SDA_#1]  15.75,82.93 90 top
U$331  [#SDO_#0]  13.21,82.93 90 top
U$332  [#_OSDO#8]  25.91,60.2 90 top
U$333  [#_OCSB#7]  23.37,60.2 90 top
U$334  [#_INT1#7]  18.29,60.2 90 top
U$335  [#_INT2#7]  20.83,60.2 90 top
U$336  [#_ASCX#5]  15.75,60.07 90 top
U$337  [#_ASDX#6]  13.21,60.2 90 top
U$338  [#PWR#2711]  14.48,74.93 0 top
U$339  [QWIIC_BMI2709]  19.56,67.06 0 top
U$340  [SPARKX-TINY]  19.56,74.17 0 top
U$341  [#I�C#2714]  24.64,74.8 0 bottom
U$342  [#LED#2712]  14.48,74.93 0 bottom
U$343  [#ADR#2713]  19.56,74.93 0 bottom
U$344  [OPEN_0X682714]  22.99,73.28 0 bottom
U$345  [CLOSED_0X692714]  23.75,72.39 0 bottom
U$346  [QWIIC_BMI2709]  19.56,67.44 0 bottom
U$347  [SPARKX-SMALL]  19.56,69.72 0 bottom
U$348  [#_OSDO#8]  25.91,60.2 90 bottom
U$349  [#_OCSB#7]  23.37,60.2 90 bottom
U$350  [#_INT2#7]  20.83,60.2 90 bottom
U$351  [#_INT1#7]  18.29,60.2 90 bottom
U$352  [#_ASCX#5]  15.75,60.07 90 bottom
U$353  [#_ASDX#6]  13.21,60.2 90 bottom
U$354  [#GND_#4]  25.91,82.55 90 bottom
U$355  [#3#3V_#4]  23.37,82.8 90 bottom
U$356  [#CS_#3]  20.83,82.55 90 bottom
U$357  [#SCL_#2]  18.29,82.55 90 bottom
U$358  [#SDA_#1]  15.75,82.93 90 bottom
U$359  [#SDO_#0]  13.21,82.93 90 bottom
U$360  [QWIIC_4MM]  29.72,66.8 0 top
U$361  BMI270  [BMI270]  45.47,71.37 0 top
U$362  [STAND-OFF]  35.31,81.53 0 top
U$363  [STAND-OFF]  55.63,81.53 0 top
U$364  [STAND-OFF]  55.63,61.21 0 top
U$365  [STAND-OFF]  35.31,61.21 0 top
U$366  [#3#3V_#4]  49.28,82.8 90 top
U$367  [#GND_#4]  51.82,82.55 90 top
U$368  [#CS_#3]  46.74,82.55 90 top
U$369  [#SCL_#2]  44.2,82.55 90 top
U$370  [#SDA_#1]  41.66,82.93 90 top
U$371  [#SDO_#0]  39.12,82.93 90 top
U$372  [#_OSDO#8]  51.82,60.2 90 top
U$373  [#_OCSB#7]  49.28,60.2 90 top
U$374  [#_INT1#7]  44.2,60.2 90 top
U$375  [#_INT2#7]  46.74,60.2 90 top
U$376  [#_ASCX#5]  41.66,60.07 90 top
U$377  [#_ASDX#6]  39.12,60.2 90 top
U$378  [#PWR#2711]  40.39,74.93 0 top
U$379  [QWIIC_BMI2709]  45.47,67.06 0 top
U$380  [SPARKX-TINY]  45.47,74.17 0 top
U$381  [#I�C#2714]  50.55,74.8 0 bottom
U$382  [#LED#2712]  40.39,74.93 0 bottom
U$383  [#ADR#2713]  45.47,74.93 0 bottom
U$384  [OPEN_0X682714]  48.89,73.28 0 bottom
U$385  [CLOSED_0X692714]  49.66,72.39 0 bottom
U$386  [QWIIC_BMI2709]  45.47,67.44 0 bottom
U$387  [SPARKX-SMALL]  45.47,69.72 0 bottom
U$388  [#_OSDO#8]  51.82,60.2 90 bottom
U$389  [#_OCSB#7]  49.28,60.2 90 bottom
U$390  [#_INT2#7]  46.74,60.2 90 bottom
U$391  [#_INT1#7]  44.2,60.2 90 bottom
U$392  [#_ASCX#5]  41.66,60.07 90 bottom
U$393  [#_ASDX#6]  39.12,60.2 90 bottom
U$394  [#GND_#4]  51.82,82.55 90 bottom
U$395  [#3#3V_#4]  49.28,82.8 90 bottom
U$396  [#CS_#3]  46.74,82.55 90 bottom
U$397  [#SCL_#2]  44.2,82.55 90 bottom
U$398  [#SDA_#1]  41.66,82.93 90 bottom
U$399  [#SDO_#0]  39.12,82.93 90 bottom
U$400  [QWIIC_4MM]  55.63,66.8 0 top
U$401  BMI270  [BMI270]  71.37,71.37 0 top
U$402  [STAND-OFF]  61.21,81.53 0 top
U$403  [STAND-OFF]  81.53,81.53 0 top
U$404  [STAND-OFF]  81.53,61.21 0 top
U$405  [STAND-OFF]  61.21,61.21 0 top
U$406  [#3#3V_#4]  75.18,82.8 90 top
U$407  [#GND_#4]  77.72,82.55 90 top
U$408  [#CS_#3]  72.64,82.55 90 top
U$409  [#SCL_#2]  70.1,82.55 90 top
U$410  [#SDA_#1]  67.56,82.93 90 top
U$411  [#SDO_#0]  65.02,82.93 90 top
U$412  [#_OSDO#8]  77.72,60.2 90 top
U$413  [#_OCSB#7]  75.18,60.2 90 top
U$414  [#_INT1#7]  70.1,60.2 90 top
U$415  [#_INT2#7]  72.64,60.2 90 top
U$416  [#_ASCX#5]  67.56,60.07 90 top
U$417  [#_ASDX#6]  65.02,60.2 90 top
U$418  [#PWR#2711]  66.29,74.93 0 top
U$419  [QWIIC_BMI2709]  71.37,67.06 0 top
U$420  [SPARKX-TINY]  71.37,74.17 0 top
U$421  [#I�C#2714]  76.45,74.8 0 bottom
U$422  [#LED#2712]  66.29,74.93 0 bottom
U$423  [#ADR#2713]  71.37,74.93 0 bottom
U$424  [OPEN_0X682714]  74.8,73.28 0 bottom
U$425  [CLOSED_0X692714]  75.56,72.39 0 bottom
U$426  [QWIIC_BMI2709]  71.37,67.44 0 bottom
U$427  [SPARKX-SMALL]  71.37,69.72 0 bottom
U$428  [#_OSDO#8]  77.72,60.2 90 bottom
U$429  [#_OCSB#7]  75.18,60.2 90 bottom
U$430  [#_INT2#7]  72.64,60.2 90 bottom
U$431  [#_INT1#7]  70.1,60.2 90 bottom
U$432  [#_ASCX#5]  67.56,60.07 90 bottom
U$433  [#_ASDX#6]  65.02,60.2 90 bottom
U$434  [#GND_#4]  77.72,82.55 90 bottom
U$435  [#3#3V_#4]  75.18,82.8 90 bottom
U$436  [#CS_#3]  72.64,82.55 90 bottom
U$437  [#SCL_#2]  70.1,82.55 90 bottom
U$438  [#SDA_#1]  67.56,82.93 90 bottom
U$439  [#SDO_#0]  65.02,82.93 90 bottom
U$440  [QWIIC_4MM]  81.53,66.8 0 top
U$441  BMI270  [BMI270]  97.28,71.37 0 top
U$442  [STAND-OFF]  87.12,81.53 0 top
U$443  [STAND-OFF]  107.44,81.53 0 top
U$444  [STAND-OFF]  107.44,61.21 0 top
U$445  [STAND-OFF]  87.12,61.21 0 top
U$446  [#3#3V_#4]  101.09,82.8 90 top
U$447  [#GND_#4]  103.63,82.55 90 top
U$448  [#CS_#3]  98.55,82.55 90 top
U$449  [#SCL_#2]  96.01,82.55 90 top
U$450  [#SDA_#1]  93.47,82.93 90 top
U$451  [#SDO_#0]  90.93,82.93 90 top
U$452  [#_OSDO#8]  103.63,60.2 90 top
U$453  [#_OCSB#7]  101.09,60.2 90 top
U$454  [#_INT1#7]  96.01,60.2 90 top
U$455  [#_INT2#7]  98.55,60.2 90 top
U$456  [#_ASCX#5]  93.47,60.07 90 top
U$457  [#_ASDX#6]  90.93,60.2 90 top
U$458  [#PWR#2711]  92.2,74.93 0 top
U$459  [QWIIC_BMI2709]  97.28,67.06 0 top
U$460  [SPARKX-TINY]  97.28,74.17 0 top
U$461  [#I�C#2714]  102.36,74.8 0 bottom
U$462  [#LED#2712]  92.2,74.93 0 bottom
U$463  [#ADR#2713]  97.28,74.93 0 bottom
U$464  [OPEN_0X682714]  100.71,73.28 0 bottom
U$465  [CLOSED_0X692714]  101.47,72.39 0 bottom
U$466  [QWIIC_BMI2709]  97.28,67.44 0 bottom
U$467  [SPARKX-SMALL]  97.28,69.72 0 bottom
U$468  [#_OSDO#8]  103.63,60.2 90 bottom
U$469  [#_OCSB#7]  101.09,60.2 90 bottom
U$470  [#_INT2#7]  98.55,60.2 90 bottom
U$471  [#_INT1#7]  96.01,60.2 90 bottom
U$472  [#_ASCX#5]  93.47,60.07 90 bottom
U$473  [#_ASDX#6]  90.93,60.2 90 bottom
U$474  [#GND_#4]  103.63,82.55 90 bottom
U$475  [#3#3V_#4]  101.09,82.8 90 bottom
U$476  [#CS_#3]  98.55,82.55 90 bottom
U$477  [#SCL_#2]  96.01,82.55 90 bottom
U$478  [#SDA_#1]  93.47,82.93 90 bottom
U$479  [#SDO_#0]  90.93,82.93 90 bottom
U$480  [QWIIC_4MM]  107.44,66.8 0 top
U$481  BMI270  [BMI270]  19.56,97.28 0 top
U$482  [STAND-OFF]  9.4,107.44 0 top
U$483  [STAND-OFF]  29.72,107.44 0 top
U$484  [STAND-OFF]  29.72,87.12 0 top
U$485  [STAND-OFF]  9.4,87.12 0 top
U$486  [#3#3V_#4]  23.37,108.71 90 top
U$487  [#GND_#4]  25.91,108.46 90 top
U$488  [#CS_#3]  20.83,108.46 90 top
U$489  [#SCL_#2]  18.29,108.46 90 top
U$490  [#SDA_#1]  15.75,108.84 90 top
U$491  [#SDO_#0]  13.21,108.84 90 top
U$492  [#_OSDO#8]  25.91,86.11 90 top
U$493  [#_OCSB#7]  23.37,86.11 90 top
U$494  [#_INT1#7]  18.29,86.11 90 top
U$495  [#_INT2#7]  20.83,86.11 90 top
U$496  [#_ASCX#5]  15.75,85.98 90 top
U$497  [#_ASDX#6]  13.21,86.11 90 top
U$498  [#PWR#2711]  14.48,100.84 0 top
U$499  [QWIIC_BMI2709]  19.56,92.96 0 top
U$500  [SPARKX-TINY]  19.56,100.08 0 top
U$501  [#I�C#2714]  24.64,100.71 0 bottom
U$502  [#LED#2712]  14.48,100.84 0 bottom
U$503  [#ADR#2713]  19.56,100.84 0 bottom
U$504  [OPEN_0X682714]  22.99,99.19 0 bottom
U$505  [CLOSED_0X692714]  23.75,98.3 0 bottom
U$506  [QWIIC_BMI2709]  19.56,93.34 0 bottom
U$507  [SPARKX-SMALL]  19.56,95.63 0 bottom
U$508  [#_OSDO#8]  25.91,86.11 90 bottom
U$509  [#_OCSB#7]  23.37,86.11 90 bottom
U$510  [#_INT2#7]  20.83,86.11 90 bottom
U$511  [#_INT1#7]  18.29,86.11 90 bottom
U$512  [#_ASCX#5]  15.75,85.98 90 bottom
U$513  [#_ASDX#6]  13.21,86.11 90 bottom
U$514  [#GND_#4]  25.91,108.46 90 bottom
U$515  [#3#3V_#4]  23.37,108.71 90 bottom
U$516  [#CS_#3]  20.83,108.46 90 bottom
U$517  [#SCL_#2]  18.29,108.46 90 bottom
U$518  [#SDA_#1]  15.75,108.84 90 bottom
U$519  [#SDO_#0]  13.21,108.84 90 bottom
U$520  [QWIIC_4MM]  29.72,92.71 0 top
U$521  BMI270  [BMI270]  45.47,97.28 0 top
U$522  [STAND-OFF]  35.31,107.44 0 top
U$523  [STAND-OFF]  55.63,107.44 0 top
U$524  [STAND-OFF]  55.63,87.12 0 top
U$525  [STAND-OFF]  35.31,87.12 0 top
U$526  [#3#3V_#4]  49.28,108.71 90 top
U$527  [#GND_#4]  51.82,108.46 90 top
U$528  [#CS_#3]  46.74,108.46 90 top
U$529  [#SCL_#2]  44.2,108.46 90 top
U$530  [#SDA_#1]  41.66,108.84 90 top
U$531  [#SDO_#0]  39.12,108.84 90 top
U$532  [#_OSDO#8]  51.82,86.11 90 top
U$533  [#_OCSB#7]  49.28,86.11 90 top
U$534  [#_INT1#7]  44.2,86.11 90 top
U$535  [#_INT2#7]  46.74,86.11 90 top
U$536  [#_ASCX#5]  41.66,85.98 90 top
U$537  [#_ASDX#6]  39.12,86.11 90 top
U$538  [#PWR#2711]  40.39,100.84 0 top
U$539  [QWIIC_BMI2709]  45.47,92.96 0 top
U$540  [SPARKX-TINY]  45.47,100.08 0 top
U$541  [#I�C#2714]  50.55,100.71 0 bottom
U$542  [#LED#2712]  40.39,100.84 0 bottom
U$543  [#ADR#2713]  45.47,100.84 0 bottom
U$544  [OPEN_0X682714]  48.89,99.19 0 bottom
U$545  [CLOSED_0X692714]  49.66,98.3 0 bottom
U$546  [QWIIC_BMI2709]  45.47,93.34 0 bottom
U$547  [SPARKX-SMALL]  45.47,95.63 0 bottom
U$548  [#_OSDO#8]  51.82,86.11 90 bottom
U$549  [#_OCSB#7]  49.28,86.11 90 bottom
U$550  [#_INT2#7]  46.74,86.11 90 bottom
U$551  [#_INT1#7]  44.2,86.11 90 bottom
U$552  [#_ASCX#5]  41.66,85.98 90 bottom
U$553  [#_ASDX#6]  39.12,86.11 90 bottom
U$554  [#GND_#4]  51.82,108.46 90 bottom
U$555  [#3#3V_#4]  49.28,108.71 90 bottom
U$556  [#CS_#3]  46.74,108.46 90 bottom
U$557  [#SCL_#2]  44.2,108.46 90 bottom
U$558  [#SDA_#1]  41.66,108.84 90 bottom
U$559  [#SDO_#0]  39.12,108.84 90 bottom
U$560  [QWIIC_4MM]  55.63,92.71 0 top
U$561  BMI270  [BMI270]  71.37,97.28 0 top
U$562  [STAND-OFF]  61.21,107.44 0 top
U$563  [STAND-OFF]  81.53,107.44 0 top
U$564  [STAND-OFF]  81.53,87.12 0 top
U$565  [STAND-OFF]  61.21,87.12 0 top
U$566  [#3#3V_#4]  75.18,108.71 90 top
U$567  [#GND_#4]  77.72,108.46 90 top
U$568  [#CS_#3]  72.64,108.46 90 top
U$569  [#SCL_#2]  70.1,108.46 90 top
U$570  [#SDA_#1]  67.56,108.84 90 top
U$571  [#SDO_#0]  65.02,108.84 90 top
U$572  [#_OSDO#8]  77.72,86.11 90 top
U$573  [#_OCSB#7]  75.18,86.11 90 top
U$574  [#_INT1#7]  70.1,86.11 90 top
U$575  [#_INT2#7]  72.64,86.11 90 top
U$576  [#_ASCX#5]  67.56,85.98 90 top
U$577  [#_ASDX#6]  65.02,86.11 90 top
U$578  [#PWR#2711]  66.29,100.84 0 top
U$579  [QWIIC_BMI2709]  71.37,92.96 0 top
U$580  [SPARKX-TINY]  71.37,100.08 0 top
U$581  [#I�C#2714]  76.45,100.71 0 bottom
U$582  [#LED#2712]  66.29,100.84 0 bottom
U$583  [#ADR#2713]  71.37,100.84 0 bottom
U$584  [OPEN_0X682714]  74.8,99.19 0 bottom
U$585  [CLOSED_0X692714]  75.56,98.3 0 bottom
U$586  [QWIIC_BMI2709]  71.37,93.34 0 bottom
U$587  [SPARKX-SMALL]  71.37,95.63 0 bottom
U$588  [#_OSDO#8]  77.72,86.11 90 bottom
U$589  [#_OCSB#7]  75.18,86.11 90 bottom
U$590  [#_INT2#7]  72.64,86.11 90 bottom
U$591  [#_INT1#7]  70.1,86.11 90 bottom
U$592  [#_ASCX#5]  67.56,85.98 90 bottom
U$593  [#_ASDX#6]  65.02,86.11 90 bottom
U$594  [#GND_#4]  77.72,108.46 90 bottom
U$595  [#3#3V_#4]  75.18,108.71 90 bottom
U$596  [#CS_#3]  72.64,108.46 90 bottom
U$597  [#SCL_#2]  70.1,108.46 90 bottom
U$598  [#SDA_#1]  67.56,108.84 90 bottom
U$599  [#SDO_#0]  65.02,108.84 90 bottom
U$600  [QWIIC_4MM]  81.53,92.71 0 top
U$601  BMI270  [BMI270]  97.28,97.28 0 top
U$602  [STAND-OFF]  87.12,107.44 0 top
U$603  [STAND-OFF]  107.44,107.44 0 top
U$604  [STAND-OFF]  107.44,87.12 0 top
U$605  [STAND-OFF]  87.12,87.12 0 top
U$606  [#3#3V_#4]  101.09,108.71 90 top
U$607  [#GND_#4]  103.63,108.46 90 top
U$608  [#CS_#3]  98.55,108.46 90 top
U$609  [#SCL_#2]  96.01,108.46 90 top
U$610  [#SDA_#1]  93.47,108.84 90 top
U$611  [#SDO_#0]  90.93,108.84 90 top
U$612  [#_OSDO#8]  103.63,86.11 90 top
U$613  [#_OCSB#7]  101.09,86.11 90 top
U$614  [#_INT1#7]  96.01,86.11 90 top
U$615  [#_INT2#7]  98.55,86.11 90 top
U$616  [#_ASCX#5]  93.47,85.98 90 top
U$617  [#_ASDX#6]  90.93,86.11 90 top
U$618  [#PWR#2711]  92.2,100.84 0 top
U$619  [QWIIC_BMI2709]  97.28,92.96 0 top
U$620  [SPARKX-TINY]  97.28,100.08 0 top
U$621  [#I�C#2714]  102.36,100.71 0 bottom
U$622  [#LED#2712]  92.2,100.84 0 bottom
U$623  [#ADR#2713]  97.28,100.84 0 bottom
U$624  [OPEN_0X682714]  100.71,99.19 0 bottom
U$625  [CLOSED_0X692714]  101.47,98.3 0 bottom
U$626  [QWIIC_BMI2709]  97.28,93.34 0 bottom
U$627  [SPARKX-SMALL]  97.28,95.63 0 bottom
U$628  [#_OSDO#8]  103.63,86.11 90 bottom
U$629  [#_OCSB#7]  101.09,86.11 90 bottom
U$630  [#_INT2#7]  98.55,86.11 90 bottom
U$631  [#_INT1#7]  96.01,86.11 90 bottom
U$632  [#_ASCX#5]  93.47,85.98 90 bottom
U$633  [#_ASDX#6]  90.93,86.11 90 bottom
U$634  [#GND_#4]  103.63,108.46 90 bottom
U$635  [#3#3V_#4]  101.09,108.71 90 bottom
U$636  [#CS_#3]  98.55,108.46 90 bottom
U$637  [#SCL_#2]  96.01,108.46 90 bottom
U$638  [#SDA_#1]  93.47,108.84 90 bottom
U$639  [#SDO_#0]  90.93,108.84 90 bottom
U$640  [QWIIC_4MM]  107.44,92.71 0 top

## Library data of the parts
C1-C16 = SparkFun-Capacitors; PROD_ID: CAP-00810
D1-D16 = SparkFun-LED; PROD_ID: DIO-00819
E$1-E$4 FD1-FD32 U$41 U$80 U$120 U$160 U$200 U$240 U$280 U$320 U$360 U$400 U$440 U$480 U$520 U$560 U$600 U$640 = SparkFun-Aesthetics
E$5 E$6 = SparkFun-Retired
FRAME1-FRAME16 = SparkFun-Aesthetics; DESIGNER: Nick P; VERSION: x01
J1 J2 J5 J6 J9 J10 J13 J14 J17 J18 J21 J22 J25 J26 J29 J30 J33 J34 J37 J38 J41 J42 J45 J46 J49 J50 J53 J54 J57 J58 J61 J62 = SparkFun-Connectors; PROD_ID: CONN-13694
J3 J4 J7 J8 J11 J12 J15 J16 J19 J20 J23 J24 J27 J28 J31 J32 J35 J36 J39 J40 J43 J44 J47 J48 J51 J52 J55 J56 J59 J60 J63 J64 = SparkFun-Connectors; PROD_ID: CONN-08437
JP1-JP48 = SparkFun-Jumpers
R1 R2 R5 R6 R9 R10 R13 R14 R17 R18 R21 R22 R25 R26 R29 R30 R33 R34 R37 R38 R41 R42 R45 R46 R49 R50 R53 R54 R57 R58 R61 R62 = SparkFun-Resistors; PROD_ID: RES-08272
R3 R7 R11 R15 R19 R23 R27 R31 R35 R39 R43 R47 R51 R55 R59 R63 = SparkFun-Resistors; PROD_ID: RES-00824
R4 R8 R12 R16 R20 R24 R28 R32 R36 R40 R44 R48 R52 R56 R60 R64 = SparkFun-Resistors; PROD_ID: RES-07856
U$1 U$40 U$81 U$121 U$161 U$201 U$241 U$281 U$321 U$361 U$401 U$441 U$481 U$521 U$561 U$601 = SparkFun-Sensors
U$2 U$7-U$19 U$21-U$26 U$28-U$39 U$46-U$59 U$61-U$66 U$68-U$79 U$86-U$99 U$101-U$106 U$108-U$119 U$126-U$139 U$141-U$146 U$148-U$159 U$166-U$179 U$181-U$186 U$188-U$199 U$206-U$219 U$221-U$226 U$228-U$239 U$246-U$259 U$261-U$266 U$268-U$279 U$286-U$299 U$301-U$306 U$308-U$319 U$326-U$339 U$341-U$346 U$348-U$359 U$366-U$379 U$381-U$386 U$388-U$399 U$406-U$419 U$421-U$426 U$428-U$439 U$446-U$459 U$461-U$466 U$468-U$479 U$486-U$499 U$501-U$506 U$508-U$519 U$526-U$539 U$541-U$546 U$548-U$559 U$566-U$579 U$581-U$586 U$588-U$599 U$606-U$619 U$621-U$626 U$628-U$639 = output
U$3-U$6 U$42-U$45 U$82-U$85 U$122-U$125 U$162-U$165 U$202-U$205 U$242-U$245 U$282-U$285 U$322-U$325 U$362-U$365 U$402-U$405 U$442-U$445 U$482-U$485 U$522-U$525 U$562-U$565 U$602-U$605 = SparkFun-Hardware
U$20 U$27 U$60 U$67 U$100 U$107 U$140 U$147 U$180 U$187 U$220 U$227 U$260 U$267 U$300 U$307 U$340 U$347 U$380 U$387 U$420 U$427 U$460 U$467 U$500 U$507 U$540 U$547 U$580 U$587 U$620 U$627 = SparkX